# Altium PCB GPS-Module-New.PcbDoc (part 2 of 2)
Units mil, origin at the board's own origin, x right, y up, seen from the top; angles counter-clockwise.
Board outline 1574.8 x 1338.32 mil, 4 copper layers (Top Layer, Int1 (GND), Int2 (PWR), Bottom Layer), stack 60.118 mil thick; 48 components, 36 nets, 261 pads, 351 vias.
Unrouted connection lines stored in the file: 101.
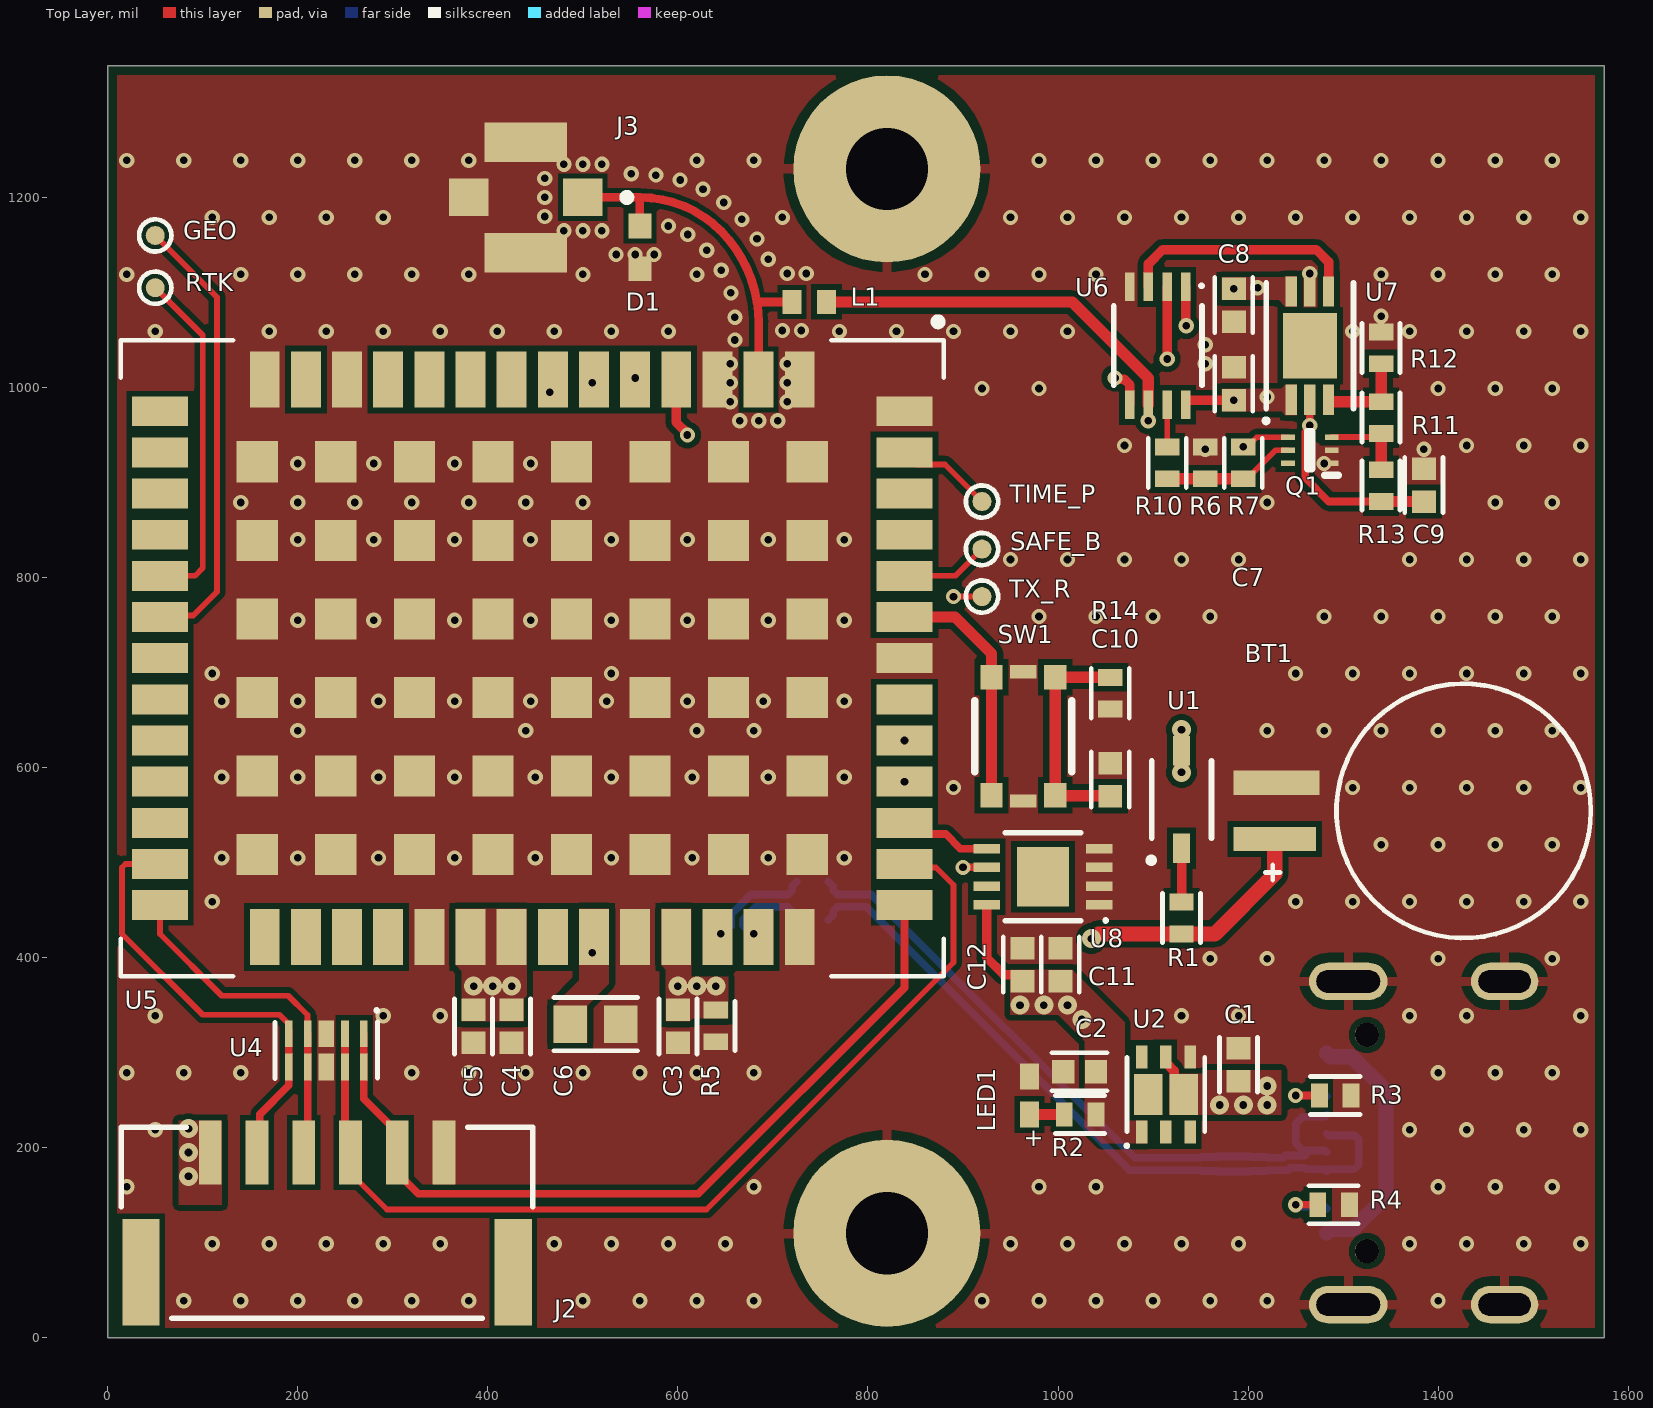
[diagram p0: Top Layer view]

## Part data (continued)
R1: library part ERJ-2RKF3001X, "Res Thick Film 0402 3K Ohm 1% 0.1W ±100ppm/°C Molded SMD Punched Carrier T/R", Case Code (Imperial)=0402, Case Code (Metric)=1005, Manufacturer=Panasonic, Max Operating Temperature=155°C, Max Power Dissipation=100mW, Min Operating Temperature=-55°C, Supplier Part Number=P3.00KLCT-ND, Temperature Coefficient=100ppm/°C, Tolerance=1%, Voltage Rating=50V, Case/Package=0402, Category="Chip SMD Resistors", China RoHS=Non-Compliant, ComponentLink1Description=https://sigma.octopart.com:443/138766958/technical_drawing/Panasonic-ERJ-2RKF3001X.pdf?src-supplier=Upverter, ComponentLink1URL=https://sigma.octopart.com:443/138766958/technical_drawing/Panasonic-ERJ-2RKF3001X.pdf?src-supplier=Upverter, ComponentLink2Description=https://datasheet.octopart.com:443/ERJ-2RKF3001X-Panasonic-datasheet-82288794.pdf?src-supplier=Panasonic+SCT, ComponentLink2URL=https://datasheet.octopart.com:443/ERJ-2RKF3001X-Panasonic-datasheet-82288794.pdf?src-supplier=Panasonic+SCT, ComponentLink3Description=https://datasheet.octopart.com:443/ERJ-2RKF3001X-Panasonic-datasheet-13266541.pdf?src-supplier=Future+Electronics, ComponentLink3URL=https://datasheet.octopart.com:443/ERJ-2RKF3001X-Panasonic-datasheet-13266541.pdf?src-supplier=Future+Electronics, ComponentLink4Description=https://datasheet.octopart.com:443/ERJ-2RKF3001X-Panasonic-datasheet-10025800.pdf?src-supplier=Future+Electronics, ComponentLink4URL=https://datasheet.octopart.com:443/ERJ-2RKF3001X-Panasonic-datasheet-10025800.pdf?src-supplier=Future+Electronics, ComponentLink5Description=https://datasheet.octopart.com:443/ERJ-2RKF3001X-Panasonic-datasheet-8853621.pdf?src-supplier=Future+Electronics, ComponentLink5URL=https://datasheet.octopart.com:443/ERJ-2RKF3001X-Panasonic-datasheet-8853621.pdf?src-supplier=Future+Electronics, ComponentLink6Description=https://datasheet.octopart.com:443/ERJ-2RKF3001X-Panasonic-datasheet-5313456.pdf?src-supplier=Future+Electronics, ComponentLink6URL=https://datasheet.octopart.com:443/ERJ-2RKF3001X-Panasonic-datasheet-5313456.pdf?src-supplier=Future+Electronics, ComponentLink7Description=https://datasheet.octopart.com:443/ERJ-2RKF3001X-Panasonic-datasheet-48891056.pdf?src-supplier=Newark, ComponentLink7URL=https://datasheet.octopart.com:443/ERJ-2RKF3001X-Panasonic-datasheet-48891056.pdf?src-supplier=Newark, ComponentLink8Description=https://datasheet.octopart.com:443/ERJ-2RKF3001X-Panasonic-datasheet-136608610.pdf?src-supplier=Newark, ComponentLink8URL=https://datasheet.octopart.com:443/ERJ-2RKF3001X-Panasonic-datasheet-136608610.pdf?src-supplier=Newark, ComponentLink9Description=https://datasheet.octopart.com:443/ERJ-2RKF3001X-Panasonic-datasheet-33006990.pdf?src-supplier=Newark, ComponentLink9URL=https://datasheet.octopart.com:443/ERJ-2RKF3001X-Panasonic-datasheet-33006990.pdf?src-supplier=Newark, ComponentLink10Description=https://datasheet.octopart.com:443/ERJ2RKF3001X-Panasonic-datasheet-21211697.pdf?src-supplier=element14+APAC, ComponentLink10URL=https://datasheet.octopart.com:443/ERJ2RKF3001X-Panasonic-datasheet-21211697.pdf?src-supplier=element14+APAC, ComponentLink11Description=https://datasheet.octopart.com:443/ERJ-2RKF3001X-Panasonic-datasheet-154766169.pdf?src-supplier=Master+Electronics, ComponentLink11URL=https://datasheet.octopart.com:443/ERJ-2RKF3001X-Panasonic-datasheet-154766169.pdf?src-supplier=Master+Electronics, ComponentLink12Description=https://datasheet.octopart.com:443/ERJ2RKF3001X-Panasonic-datasheet-188592431.pdf?src-supplier=TME, ComponentLink12URL=https://datasheet.octopart.com:443/ERJ2RKF3001X-Panasonic-datasheet-188592431.pdf?src-supplier=TME, ComponentLink13Description=https://datasheet.octopart.com:443/ERJ2RKF3001X-Panasonic-datasheet-164353789.pdf?src-supplier=TME, ComponentLink13URL=https://datasheet.octopart.com:443/ERJ2RKF3001X-Panasonic-datasheet-164353789.pdf?src-supplier=TME, ComponentLink14Description=https://datasheet.octopart.com/ERJ-2RKF3001X-Panasonic-datasheet-78375410.pdf, ComponentLink14URL=https://datasheet.octopart.com/ERJ-2RKF3001X-Panasonic-datasheet-78375410.pdf, ComponentLink15Description=https://datasheet.octopart.com:443/ERJ-2RKF3001X-Panasonic---ECG-datasheet-15994758.pdf?src-supplier=Farnell, ComponentLink15URL=https://datasheet.octopart.com:443/ERJ-2RKF3001X-Panasonic---ECG-datasheet-15994758.pdf?src-supplier=Farnell, ComponentLink16Description=https://datasheet.octopart.com:443/ERJ-2RKF3001X-Panasonic-datasheet-11542829.pdf?src-supplier=Arrow+Electronics, ComponentLink16URL=https://datasheet.octopart.com:443/ERJ-2RKF3001X-Panasonic-datasheet-11542829.pdf?src-supplier=Arrow+Electronics, ComponentLink17Description=https://datasheet.octopart.com:443/ERJ-2RKF3001X-Panasonic-datasheet-41391857.pdf?src-supplier=Electro+Sonic, ComponentLink17URL=https://datasheet.octopart.com:443/ERJ-2RKF3001X-Panasonic-datasheet-41391857.pdf?src-supplier=Electro+Sonic, Composition="Thick Film", Contact Plating=Tin, Depth=500µm, Features="Automotive AEC-Q200", Height=350µm, Lead Free="Lead Free", Length=1mm, Lifecycle Status=Production, Military Standard=Not, Mounting Technology="Surface Mount", MPN=ERJ-2RKF3001X, Number of Terminals=2, Number of Terminations=2, Packaging="Cut Tape", Power Dissipation=100mW, Power Rating=100mW, Pricing="1=0.1, 10=0.028, 25=0.0208, 50=0.0168, 100=0.0138, 250=0.01072, 500=0.009, 1000=0.00766, 5000=0.00554 (USD)", Radiation Hardening=No, REACH SVHC=Yes, RoHS=Compliant, Schedule B="8533210045, 8533210045|8533210045, 8533210045|8533210045|8533210045, 8533210045|8533210045|8533210045|8533210045", Stock=193068, Supplier=DigiKey, Termination=SMD/SMT, Voltage Rating (DC)=50V, Width=500µm, Working Voltage=50V
R2 R14: library part CRCW0402100RFKEDHP, "Res Thick Film 0402 100 Ohm 1% 0.2W ±100ppm/°C Molded SMD SMD Paper T/R", Case Code (Imperial)=0402, Case Code (Metric)=1005, Manufacturer=Vishay, Manufacturer Package Identifier=CRCW0402-HPe3, Max Operating Temperature=155°C, Min Operating Temperature=-55°C, Power Dissipation=200mW, Supplier Part Number=541-100YCT-ND, Temperature Coefficient=100ppm/°C, Tolerance=1%, Voltage Rating=50V, Case/Package=0402, Category="Chip SMD Resistors", China RoHS=Non-Compliant, ComponentLink1Description=https://datasheet.octopart.com/CRCW0402100RFKEDHP-Vishay-datasheet-83567917.pdf, ComponentLink1URL=https://datasheet.octopart.com/CRCW0402100RFKEDHP-Vishay-datasheet-83567917.pdf, ComponentLink2Description=https://datasheet.octopart.com/D-CRCW-e3-Standard-Thick-Film-Chip-Resistors-Vishay-datasheet-family-64.pdf, ComponentLink2URL=https://datasheet.octopart.com/D-CRCW-e3-Standard-Thick-Film-Chip-Resistors-Vishay-datasheet-family-64.pdf, ComponentLink3Description=https://datasheet.octopart.com:443/CRCW0402100RFKEDHP-Vishay-datasheet-87136057.pdf?src-supplier=element14+APAC, ComponentLink3URL=https://datasheet.octopart.com:443/CRCW0402100RFKEDHP-Vishay-datasheet-87136057.pdf?src-supplier=element14+APAC, ComponentLink4Description=https://datasheet.octopart.com:443/CRCW0402100RFKEDHP-Vishay-datasheet-78776210.pdf?src-supplier=element14+APAC, ComponentLink4URL=https://datasheet.octopart.com:443/CRCW0402100RFKEDHP-Vishay-datasheet-78776210.pdf?src-supplier=element14+APAC, ComponentLink5Description=https://datasheet.octopart.com:443/CRCW0402100RFKEDHP-Vishay-datasheet-62317933.pdf?src-supplier=element14+APAC, ComponentLink5URL=https://datasheet.octopart.com:443/CRCW0402100RFKEDHP-Vishay-datasheet-62317933.pdf?src-supplier=element14+APAC, ComponentLink6Description=https://datasheet.octopart.com:443/CRCW0402100RFKEDHP-Vishay-datasheet-37143532.pdf?src-supplier=element14+APAC, ComponentLink6URL=https://datasheet.octopart.com:443/CRCW0402100RFKEDHP-Vishay-datasheet-37143532.pdf?src-supplier=element14+APAC, ComponentLink7Description=https://datasheet.octopart.com:443/CRCW0402100RFKEDHP-Vishay-datasheet-66581887.pdf?src-supplier=element14+APAC, ComponentLink7URL=https://datasheet.octopart.com:443/CRCW0402100RFKEDHP-Vishay-datasheet-66581887.pdf?src-supplier=element14+APAC, ComponentLink8Description=https://datasheet.octopart.com:443/CRCW0402100RFKEDHP-Vishay-datasheet-13148866.pdf?src-supplier=_legacy+Avnet, ComponentLink8URL=https://datasheet.octopart.com:443/CRCW0402100RFKEDHP-Vishay-datasheet-13148866.pdf?src-supplier=_legacy+Avnet, ComponentLink9Description=https://datasheet.octopart.com:443/CRCW0402100RFKEDHP-Vishay-datasheet-13131392.pdf?src-supplier=_legacy+Avnet, ComponentLink9URL=https://datasheet.octopart.com:443/CRCW0402100RFKEDHP-Vishay-datasheet-13131392.pdf?src-supplier=_legacy+Avnet, ComponentLink10Description=https://datasheet.octopart.com:443/CRCW0402100RFKEDHP-Vishay-datasheet-12593106.pdf?src-supplier=_legacy+Avnet, ComponentLink10URL=https://datasheet.octopart.com:443/CRCW0402100RFKEDHP-Vishay-datasheet-12593106.pdf?src-supplier=_legacy+Avnet, ComponentLink11Description=https://datasheet.octopart.com:443/CRCW0402100RFKEDHP-Vishay-datasheet-12544674.pdf?src-supplier=_legacy+Avnet, ComponentLink11URL=https://datasheet.octopart.com:443/CRCW0402100RFKEDHP-Vishay-datasheet-12544674.pdf?src-supplier=_legacy+Avnet, ComponentLink12Description=https://datasheet.octopart.com:443/CRCW0402100RFKEDHP-Vishay-datasheet-12531795.pdf?src-supplier=_legacy+Avnet, ComponentLink12URL=https://datasheet.octopart.com:443/CRCW0402100RFKEDHP-Vishay-datasheet-12531795.pdf?src-supplier=_legacy+Avnet, ComponentLink13Description=https://datasheet.octopart.com:443/CRCW0402100RFKEDHP-Vishay-datasheet-12518686.pdf?src-supplier=_legacy+Avnet, ComponentLink13URL=https://datasheet.octopart.com:443/CRCW0402100RFKEDHP-Vishay-datasheet-12518686.pdf?src-supplier=_legacy+Avnet, ComponentLink14Description=https://datasheet.octopart.com:443/CRCW0402100RFKEDHP-Vishay-datasheet-12509906.pdf?src-supplier=_legacy+Avnet, ComponentLink14URL=https://datasheet.octopart.com:443/CRCW0402100RFKEDHP-Vishay-datasheet-12509906.pdf?src-supplier=_legacy+Avnet, ComponentLink15Description=https://datasheet.octopart.com:443/CRCW0402100RFKEDHP-Vishay-datasheet-10669844.pdf?src-supplier=_legacy+Avnet, ComponentLink15URL=https://datasheet.octopart.com:443/CRCW0402100RFKEDHP-Vishay-datasheet-10669844.pdf?src-supplier=_legacy+Avnet, ComponentLink16Description=https://datasheet.octopart.com:443/CRCW0402100RFKEDHP-Vishay-datasheet-8703221.pdf?src-supplier=_legacy+Avnet, ComponentLink16URL=https://datasheet.octopart.com:443/CRCW0402100RFKEDHP-Vishay-datasheet-8703221.pdf?src-supplier=_legacy+Avnet, ComponentLink17Description=https://datasheet.octopart.com:443/CRCW0402100RFKEDHP-Vishay-datasheet-62316122.pdf?src-supplier=Future+Electronics, ComponentLink17URL=https://datasheet.octopart.com:443/CRCW0402100RFKEDHP-Vishay-datasheet-62316122.pdf?src-supplier=Future+Electronics, ComponentLink18Description=https://datasheet.octopart.com:443/CRCW0402100RFKEDHP-Vishay-Dale-datasheet-47688881.pdf?src-supplier=RS+(Formerly+Allied+Electronics), ComponentLink18URL=https://datasheet.octopart.com:443/CRCW0402100RFKEDHP-Vishay-Dale-datasheet-47688881.pdf?src-supplier=RS+(Formerly+Allied+Electronics), ComponentLink19Description=https://datasheet.octopart.com:443/CRCW0402100RFKEDHP-Vishay-datasheet-8359436.pdf?src-supplier=Newark, ComponentLink19URL=https://datasheet.octopart.com:443/CRCW0402100RFKEDHP-Vishay-datasheet-8359436.pdf?src-supplier=Newark, ComponentLink20Description=http://sigma.octopart.com:80/rohs_certificate/D-CRCW-e3-Standard-Thick-Film-Chip-Resistors-Vishay-family-102.pdf?src-supplier=Compliance+Statements, ComponentLink20URL=http://sigma.octopart.com:80/rohs_certificate/D-CRCW-e3-Standard-Thick-Film-Chip-Resistors-Vishay-family-102.pdf?src-supplier=Compliance+Statements, Composition="Thick Film", Contact Plating=Tin, Depth=500µm, Height=300µm, Lead Free="Lead Free", Length=1mm, Lifecycle Status=Production, Mounting Technology="Surface Mount", MPN=CRCW0402100RFKEDHP, Number of Terminals=2, Packaging="Cut Tape", Power Rating=200mW, Pricing="1=0.11, 10=0.054, 25=0.0412, 50=0.034, 100=0.0286, 250=0.02312, 500=0.02002, 1000=0.01755, 5000=0.01363 (USD)", Radiation Hardening=No, REACH SVHC=Yes, RoHS=Compliant, Schedule B="8533210045, 8533210045|8533210045|8533210045|8533210045|8533210045|8533210045|8533210045, 8533210045|8533210045|8533210045|8533210045|8533210045|8533210045|8533210045|8533210045, 8533210045|8533210045|8533210045|8533210045|8533210045|8533210045|8533210045|8533210045|8533210045", Stock=523985, Supplier=DigiKey, Termination=SMD/SMT, Voltage Rating (DC)=50V, Weight=652.039032µg, Width=500µm, Working Voltage=50V
R3 R4: library part RC0402FR-135K1L, "Res Thick Film 0402 5.1K Ohm 1% 0.063W(1/16W) ±100ppm/C Pad SMD T/R", Case Code (Imperial)=0402, Case Code (Metric)=1005, Manufacturer="Yageo Group", Max Operating Temperature=155°C, Min Operating Temperature=-55°C, Power Dissipation=62.5mW, Supplier Part Number=13-RC0402FR-135K1LCT-ND, Temperature Coefficient=100ppm/°C, Tolerance=1%, Voltage Rating=50V, Case/Package=0402, Category="Chip SMD Resistors", China RoHS=Non-Compliant, ComponentLink1Description=https://datasheet.octopart.com:443/RC0402FR-135K1L-Yageo-datasheet-175887523.pdf?src-supplier=IHS, ComponentLink1URL=https://datasheet.octopart.com:443/RC0402FR-135K1L-Yageo-datasheet-175887523.pdf?src-supplier=IHS, ComponentLink2Description=https://datasheet.octopart.com:443/RC0402FR-135K1L-Yageo-datasheet-164759695.pdf?src-supplier=Future+Electronics, ComponentLink2URL=https://datasheet.octopart.com:443/RC0402FR-135K1L-Yageo-datasheet-164759695.pdf?src-supplier=Future+Electronics, ComponentLink3Description=https://datasheet.octopart.com/RC0402FR-135K1L-Yageo-datasheet-73766026.pdf, ComponentLink3URL=https://datasheet.octopart.com/RC0402FR-135K1L-Yageo-datasheet-73766026.pdf, ComponentLink4Description=https://datasheet.octopart.com:443/RC0402FR-135K1L-Yageo-datasheet-10408619.pdf?src-supplier=_legacy+Avnet, ComponentLink4URL=https://datasheet.octopart.com:443/RC0402FR-135K1L-Yageo-datasheet-10408619.pdf?src-supplier=_legacy+Avnet, ComponentLink5Description=http://sigma.octopart.com:80/conflict_mineral_statement/Yageo-company-3.pdf?src-supplier=Compliance+Statements, ComponentLink5URL=http://sigma.octopart.com:80/conflict_mineral_statement/Yageo-company-3.pdf?src-supplier=Compliance+Statements, ComponentLink6Description=http://sigma.octopart.com:80/rohs_statement/Yageo-company-2.pdf?src-supplier=Compliance+Statements, ComponentLink6URL=http://sigma.octopart.com:80/rohs_statement/Yageo-company-2.pdf?src-supplier=Compliance+Statements, Composition="Thick Film", Contact Plating=Tin, Height=350µm, Length=1mm, Lifecycle Status=Production, Mounting Technology="Surface Mount", MPN=RC0402FR-135K1L, Number of Terminals=2, Packaging="Tape & Reel", Power Rating=62.5mW, Pricing="1=0.1, 10=0.005, 25=0.0044, 50=0.004, 100=0.0036, 250=0.00328 (USD)", Radiation Hardening=No, REACH SVHC=Yes, RoHS=Compliant, Stock=214134, Supplier=DigiKey, Termination=SMD/SMT, Width=500µm, Working Voltage=50V
R5 R7 R12: library part CRCW0402100KFKEDC, "Res Thick Film 0402 100K Ohm 1% 0.063W(1/16W) ±100ppm/C Pad SMD T/R", Case/Package=0402, Manufacturer=Vishay, Max Operating Temperature=155°C, Min Operating Temperature=-55°C, Power Dissipation=63mW, Supplier Part Number=541-3960-1-ND, Temperature Coefficient=100ppm/°C, Tolerance=1%, Voltage Rating=50V, Category="Chip SMD Resistors", China RoHS=Non-Compliant, ComponentLink1Description=https://datasheet.octopart.com:443/CRCW0402100KFKEDC-Vishay-datasheet-102570912.pdf?src-supplier=Upverter, ComponentLink1URL=https://datasheet.octopart.com:443/CRCW0402100KFKEDC-Vishay-datasheet-102570912.pdf?src-supplier=Upverter, ComponentLink2Description=https://datasheet.octopart.com:443/CRCW0402100KFKEDC-Vishay-datasheet-175423585.pdf?src-supplier=IHS, ComponentLink2URL=https://datasheet.octopart.com:443/CRCW0402100KFKEDC-Vishay-datasheet-175423585.pdf?src-supplier=IHS, ComponentLink3Description=https://datasheet.octopart.com:443/CRCW0402100KFKEDC-Vishay-datasheet-100063072.pdf?src-supplier=Future+Electronics, ComponentLink3URL=https://datasheet.octopart.com:443/CRCW0402100KFKEDC-Vishay-datasheet-100063072.pdf?src-supplier=Future+Electronics, ComponentLink4Description=https://datasheet.octopart.com:443/CRCW0402100KFKEDC-Vishay-datasheet-62316122.pdf?src-supplier=Future+Electronics, ComponentLink4URL=https://datasheet.octopart.com:443/CRCW0402100KFKEDC-Vishay-datasheet-62316122.pdf?src-supplier=Future+Electronics, ComponentLink5Description=http://sigma.octopart.com:80/rohs_statement/Vishay-company-15.pdf?src-supplier=Compliance+Statements, ComponentLink5URL=http://sigma.octopart.com:80/rohs_statement/Vishay-company-15.pdf?src-supplier=Compliance+Statements, Composition="Thick Film", Contact Plating=Tin, Height=300µm, Lead Free="Lead Free", Length=1mm, Lifecycle Status=Production, Mounting Technology="Surface Mount", MPN=CRCW0402100KFKEDC, Number of Terminals=2, Power Rating=63mW, Pricing="1=0.1, 10=0.028, 25=0.0208, 50=0.0168, 100=0.0138, 250=0.01072, 500=0.009, 1000=0.00766, 5000=0.00554 (USD)", REACH SVHC=Yes, RoHS=Compliant, Schedule B="8533210045, 8533210045|8533210045, 8533210045|8533210045|8533210045, 8533210045|8533210045|8533210045|8533210045", Stock=265190, Supplier=DigiKey, Termination=Wraparound, Width=500µm, Working Voltage=50V
R6 R10: library part RC0402JR-070RL, "GENERAL PURPOSE CHIP RESISTOR Metal Glaze/thick Film, 0.0625W, 0ohm, Surface Mount, 0402", Case Code (Imperial)=0402, Manufacturer="Yageo Group", Max Operating Temperature=155°C, Max Power Dissipation=63mW, Min Operating Temperature=-55°C, Power Dissipation=62.5mW, Supplier Part Number=311-0.0JRCT-ND, Temperature Coefficient=200ppm/°C, Tolerance=5%, Voltage Rating=50V, Case/Package=0402, Category="Chip SMD Resistors", China RoHS=Non-Compliant, ComponentLink1Description=https://datasheet.octopart.com:443/RC0402JR-070RL-Yageo-datasheet-182189538.pdf?src-supplier=IHS, ComponentLink1URL=https://datasheet.octopart.com:443/RC0402JR-070RL-Yageo-datasheet-182189538.pdf?src-supplier=IHS, ComponentLink2Description=https://datasheet.octopart.com:443/RC0402JR-070RL-Yageo-datasheet-10408619.pdf?src-supplier=Newark, ComponentLink2URL=https://datasheet.octopart.com:443/RC0402JR-070RL-Yageo-datasheet-10408619.pdf?src-supplier=Newark, ComponentLink3Description=https://datasheet.octopart.com:443/RC0402JR-070RL-Yageo-datasheet-12531192.pdf?src-supplier=Seeed+Studio, ComponentLink3URL=https://datasheet.octopart.com:443/RC0402JR-070RL-Yageo-datasheet-12531192.pdf?src-supplier=Seeed+Studio, ComponentLink4Description=https://datasheet.octopart.com:443/RC0402JR-070RL-Yageo-datasheet-8324527.pdf?src-supplier=TME, ComponentLink4URL=https://datasheet.octopart.com:443/RC0402JR-070RL-Yageo-datasheet-8324527.pdf?src-supplier=TME, ComponentLink5Description=https://datasheet.octopart.com:443/RC0402JR-070RL-Yageo-datasheet-62067350.pdf?src-supplier=Farnell, ComponentLink5URL=https://datasheet.octopart.com:443/RC0402JR-070RL-Yageo-datasheet-62067350.pdf?src-supplier=Farnell, ComponentLink6Description=https://datasheet.octopart.com:443/RC0402JR-070RL-Yageo-datasheet-8329306.pdf?src-supplier=element14, ComponentLink6URL=https://datasheet.octopart.com:443/RC0402JR-070RL-Yageo-datasheet-8329306.pdf?src-supplier=element14, ComponentLink7Description=https://datasheet.octopart.com:443/RC0402JR-070RL-Yageo-datasheet-505231.pdf?src-supplier=element14, ComponentLink7URL=https://datasheet.octopart.com:443/RC0402JR-070RL-Yageo-datasheet-505231.pdf?src-supplier=element14, ComponentLink8Description=https://datasheet.octopart.com:443/RC0402JR-070RL-Yageo-datasheet-175423674.pdf?src-supplier=SOS+electronic, ComponentLink8URL=https://datasheet.octopart.com:443/RC0402JR-070RL-Yageo-datasheet-175423674.pdf?src-supplier=SOS+electronic, ComponentLink9Description=https://datasheet.octopart.com:443/RC0402JR-070RL-Yageo-datasheet-164759695.pdf?src-supplier=Future+Electronics, ComponentLink9URL=https://datasheet.octopart.com:443/RC0402JR-070RL-Yageo-datasheet-164759695.pdf?src-supplier=Future+Electronics, ComponentLink10Description=https://datasheet.octopart.com:443/RC0402JR-070RL-Yageo-datasheet-137700087.pdf?src-supplier=Future+Electronics, ComponentLink10URL=https://datasheet.octopart.com:443/RC0402JR-070RL-Yageo-datasheet-137700087.pdf?src-supplier=Future+Electronics, ComponentLink11Description=https://datasheet.octopart.com/RC0402JR-070RL-Yageo-datasheet-73766026.pdf, ComponentLink11URL=https://datasheet.octopart.com/RC0402JR-070RL-Yageo-datasheet-73766026.pdf, ComponentLink12Description=http://sigma.octopart.com:80/conflict_mineral_statement/Yageo-company-3.pdf?src-supplier=Compliance+Statements, ComponentLink12URL=http://sigma.octopart.com:80/conflict_mineral_statement/Yageo-company-3.pdf?src-supplier=Compliance+Statements, ComponentLink13Description=http://sigma.octopart.com:80/rohs_statement/Yageo-company-2.pdf?src-supplier=Compliance+Statements, ComponentLink13URL=http://sigma.octopart.com:80/rohs_statement/Yageo-company-2.pdf?src-supplier=Compliance+Statements, Composition="Thick Film", Contact Plating=Tin, Depth=500µm, Features="Moisture Resistant", Height=350µm, Lead Free="Lead Free", Length=1mm, Lifecycle Status=Production, Military Standard=Not, Mounting Technology="Surface Mount", MPN=RC0402JR-070RL, Number of Terminals=2, Number of Terminations=2, Packaging="Tape & Reel", Pins=2, Power Rating=63mW, Pricing="1=0.1, 10=0.010, 25=0.0064, 50=0.0054, 100=0.0047, 250=0.00392, 500=0.00346, 1000=0.00304, 5000=0.0023 (USD)", Radiation Hardening=No, REACH SVHC=Yes, RoHS=Compliant, Schedule B="8533290000, 8533290000|8533290000, 8533290000|8533290000|8533290000, 8533290000|8533290000|8533290000|8533290000", Stock=22123349, Supplier=DigiKey, Termination=SMD/SMT, Voltage Rating (DC)=50V, Width=500µm
R8 R9: library part RC0402JR-0727RL, "Res General Purpose Thick Film 0402 27 Ohm 5% 1/16W ±100ppm/°C Molded SMD Paper T/R", Case Code (Imperial)=0402, Manufacturer="Yageo Group", Max Operating Temperature=155°C, Min Operating Temperature=-55°C, Power Dissipation=62.5mW, Supplier Part Number=311-27JRCT-ND, Temperature Coefficient=100ppm/°C, Tolerance=5%, Voltage Rating=50V, Case/Package=0402, Category="Chip SMD Resistors", China RoHS=Non-Compliant, ComponentLink1Description=https://datasheet.octopart.com:443/RC0402JR-0727RL-Yageo-datasheet-175887523.pdf?src-supplier=IHS, ComponentLink1URL=https://datasheet.octopart.com:443/RC0402JR-0727RL-Yageo-datasheet-175887523.pdf?src-supplier=IHS, ComponentLink2Description=https://datasheet.octopart.com:443/RC0402JR-0727RL-Yageo-datasheet-10408619.pdf?src-supplier=Newark, ComponentLink2URL=https://datasheet.octopart.com:443/RC0402JR-0727RL-Yageo-datasheet-10408619.pdf?src-supplier=Newark, ComponentLink3Description=https://datasheet.octopart.com:443/RC0402JR-0727RL-Yageo-datasheet-8324527.pdf?src-supplier=Newark, ComponentLink3URL=https://datasheet.octopart.com:443/RC0402JR-0727RL-Yageo-datasheet-8324527.pdf?src-supplier=Newark, ComponentLink4Description=https://datasheet.octopart.com:443/RC0402JR-0727RL-Yageo-datasheet-62067350.pdf?src-supplier=element14+APAC, ComponentLink4URL=https://datasheet.octopart.com:443/RC0402JR-0727RL-Yageo-datasheet-62067350.pdf?src-supplier=element14+APAC, ComponentLink5Description=https://datasheet.octopart.com:443/RC0402JR-0727RL-Yageo-datasheet-164759695.pdf?src-supplier=Future+Electronics, ComponentLink5URL=https://datasheet.octopart.com:443/RC0402JR-0727RL-Yageo-datasheet-164759695.pdf?src-supplier=Future+Electronics, ComponentLink6Description=https://datasheet.octopart.com:443/RC0402JR-0727RL-Yageo-datasheet-127823281.pdf?src-supplier=Future+Electronics, ComponentLink6URL=https://datasheet.octopart.com:443/RC0402JR-0727RL-Yageo-datasheet-127823281.pdf?src-supplier=Future+Electronics, ComponentLink7Description=https://datasheet.octopart.com:443/RC0402JR-0727RL-Yageo-datasheet-137700087.pdf?src-supplier=Future+Electronics, ComponentLink7URL=https://datasheet.octopart.com:443/RC0402JR-0727RL-Yageo-datasheet-137700087.pdf?src-supplier=Future+Electronics, ComponentLink8Description=https://datasheet.octopart.com:443/RC0402JR-0727RL-Yageo-datasheet-103092701.pdf?src-supplier=Future+Electronics, ComponentLink8URL=https://datasheet.octopart.com:443/RC0402JR-0727RL-Yageo-datasheet-103092701.pdf?src-supplier=Future+Electronics, ComponentLink9Description=https://datasheet.octopart.com:443/RC0402JR-0727RL-Yageo-datasheet-12531192.pdf?src-supplier=Future+Electronics, ComponentLink9URL=https://datasheet.octopart.com:443/RC0402JR-0727RL-Yageo-datasheet-12531192.pdf?src-supplier=Future+Electronics, ComponentLink10Description=https://datasheet.octopart.com:443/RC0402JR-0727RL-Yageo-datasheet-505231.pdf?src-supplier=Future+Electronics, ComponentLink10URL=https://datasheet.octopart.com:443/RC0402JR-0727RL-Yageo-datasheet-505231.pdf?src-supplier=Future+Electronics, ComponentLink11Description=https://datasheet.octopart.com/RC0402JR-0727RL-Yageo-datasheet-73766026.pdf, ComponentLink11URL=https://datasheet.octopart.com/RC0402JR-0727RL-Yageo-datasheet-73766026.pdf, ComponentLink12Description=https://datasheet.octopart.com:443/RC0402JR-0727RL-Yageo-datasheet-8329306.pdf?src-supplier=element14, ComponentLink12URL=https://datasheet.octopart.com:443/RC0402JR-0727RL-Yageo-datasheet-8329306.pdf?src-supplier=element14, ComponentLink13Description=http://sigma.octopart.com:80/rohs_statement/Yageo-company-2.pdf?src-supplier=Compliance+Statements, ComponentLink13URL=http://sigma.octopart.com:80/rohs_statement/Yageo-company-2.pdf?src-supplier=Compliance+Statements, ComponentLink14Description=http://sigma.octopart.com:80/conflict_mineral_statement/Yageo-company-3.pdf?src-supplier=Compliance+Statements, ComponentLink14URL=http://sigma.octopart.com:80/conflict_mineral_statement/Yageo-company-3.pdf?src-supplier=Compliance+Statements, Composition="Thick Film", Depth=500µm, Height=350µm, Lead Free="Lead Free", Length=1mm, Lifecycle Status=Production, Military Standard=Not, Mounting Technology="Surface Mount", MPN=RC0402JR-0727RL, Number of Terminals=2, Pins=2, Power Rating=62.5mW, Pricing="1=0.1, 10=0.006, 25=0.0044, 50=0.003, 100=0.0028 (USD)", REACH SVHC=Yes, RoHS=Compliant, Schedule B="8533210045, 8533210045|8533210045|8533210045|8533210045|8533210045", Stock=810923, Supplier=DigiKey, Termination=SMD/SMT, Voltage Rating (AC)=50V, Voltage Rating (DC)=50V, Weight=652.039032µg, Width=500µm, Working Voltage=50V
R11: library part CRCW04021K00FKEDC, "Res Thick Film 0402 1K Ohm 1% 0.063W(1/16W) ±100ppm/C Pad SMD T/R", Case/Package=0402, Manufacturer=Vishay, Max Operating Temperature=155°C, Min Operating Temperature=-55°C, Power Dissipation=63mW, Supplier Part Number=541-3961-1-ND, Temperature Coefficient=100ppm/°C, Tolerance=1%, Voltage Rating=50V, Category="Chip SMD Resistors", China RoHS=Non-Compliant, ComponentLink1Description=https://datasheet.octopart.com:443/CRCW04021K00FKEDC-Vishay-datasheet-102570912.pdf?src-supplier=Upverter, ComponentLink1URL=https://datasheet.octopart.com:443/CRCW04021K00FKEDC-Vishay-datasheet-102570912.pdf?src-supplier=Upverter, ComponentLink2Description=https://datasheet.octopart.com:443/CRCW04021K00FKEDC-Vishay-datasheet-175423585.pdf?src-supplier=IHS, ComponentLink2URL=https://datasheet.octopart.com:443/CRCW04021K00FKEDC-Vishay-datasheet-175423585.pdf?src-supplier=IHS, ComponentLink3Description=https://datasheet.octopart.com:443/CRCW04021K00FKEDC-Vishay-datasheet-100063072.pdf?src-supplier=Future+Electronics, ComponentLink3URL=https://datasheet.octopart.com:443/CRCW04021K00FKEDC-Vishay-datasheet-100063072.pdf?src-supplier=Future+Electronics, ComponentLink4Description=https://datasheet.octopart.com:443/CRCW04021K00FKEDC-Vishay-datasheet-62316122.pdf?src-supplier=Future+Electronics, ComponentLink4URL=https://datasheet.octopart.com:443/CRCW04021K00FKEDC-Vishay-datasheet-62316122.pdf?src-supplier=Future+Electronics, ComponentLink5Description=http://sigma.octopart.com:80/rohs_statement/Vishay-company-15.pdf?src-supplier=Compliance+Statements, ComponentLink5URL=http://sigma.octopart.com:80/rohs_statement/Vishay-company-15.pdf?src-supplier=Compliance+Statements, Composition="Thick Film", Contact Plating=Tin, Height=300µm, Lead Free="Lead Free", Length=1mm, Lifecycle Status=Production, Mounting Technology="Surface Mount", MPN=CRCW04021K00FKEDC, Number of Terminals=2, Power Rating=63mW, Pricing="1=0.1, 10=0.028, 25=0.0208, 50=0.0168, 100=0.0138, 250=0.01072, 500=0.009, 1000=0.00766, 5000=0.00546 (USD)", REACH SVHC=Yes, RoHS=Compliant, Schedule B="8533210045, 8533210045|8533210045|8533210045|8533210045|8533210045", Stock=1938339, Supplier=DigiKey, Termination=Wraparound, Width=500µm, Working Voltage=50V
R13: library part CR0402-FX-18R0GLF, "Res Thick Film 0402 18 Ohm 1% 0.063W(1/16W) ±100ppm/C Pad SMD T/R", Case Code (Imperial)=0402, Case Code (Metric)=1005, Manufacturer=Bourns, Max Operating Temperature=155°C, Min Operating Temperature=-55°C, Power Dissipation=62.5mW, Supplier Part Number=CR0402-FX-18R0GLFCT-ND, Temperature Coefficient=100ppm/°C, Tolerance=1%, Voltage Rating=50V, Case/Package=0402, Category="Chip SMD Resistors", China RoHS=Non-Compliant, ComponentLink1Description=https://datasheet.octopart.com:443/CR0402-FX-18R0GLF-Bourns-datasheet-159578630.pdf?src-supplier=IHS, ComponentLink1URL=https://datasheet.octopart.com:443/CR0402-FX-18R0GLF-Bourns-datasheet-159578630.pdf?src-supplier=IHS, ComponentLink2Description=https://datasheet.octopart.com:443/CR0402-FX-18R0GLF-Bourns-datasheet-181955239.pdf?src-supplier=IHS, ComponentLink2URL=https://datasheet.octopart.com:443/CR0402-FX-18R0GLF-Bourns-datasheet-181955239.pdf?src-supplier=IHS, ComponentLink3Description=https://datasheet.octopart.com:443/CR0402-FX-18R0GLF-Bourns-datasheet-154729664.pdf?src-supplier=Electro+Sonic, ComponentLink3URL=https://datasheet.octopart.com:443/CR0402-FX-18R0GLF-Bourns-datasheet-154729664.pdf?src-supplier=Electro+Sonic, ComponentLink4Description=https://datasheet.octopart.com/CR0402-FX-18R0GLF-Bourns-datasheet-8723995.pdf, ComponentLink4URL=https://datasheet.octopart.com/CR0402-FX-18R0GLF-Bourns-datasheet-8723995.pdf, ComponentLink5Description=https://datasheet.octopart.com:443/CR0402-FX-18R0GLF-Bourns-datasheet-140567134.pdf?src-supplier=Arrow.cn, ComponentLink5URL=https://datasheet.octopart.com:443/CR0402-FX-18R0GLF-Bourns-datasheet-140567134.pdf?src-supplier=Arrow.cn, ComponentLink6Description=http://sigma.octopart.com:80/conflict_mineral_statement/Bourns-company-36.pdf?src-supplier=Compliance+Statements, ComponentLink6URL=http://sigma.octopart.com:80/conflict_mineral_statement/Bourns-company-36.pdf?src-supplier=Compliance+Statements, Composition="Thick Film", Contact Plating=Tin, Depth=500µm, Height=320µm, Lifecycle Status=Production, Military Standard=Not, Mounting Technology="Surface Mount", MPN=CR0402-FX-18R0GLF, Number of Terminals=2, Power Rating=62.5mW, Pricing="1=0.1, 10=0.016, 25=0.0112, 50=0.0086, 100=0.0069, 250=0.00516, 500=0.00422, 1000=0.00349, 5000=0.00259 (USD)", Radiation Hardening=No, REACH SVHC=Yes, RoHS=Compliant, Schedule B="8533210045, 8533210045|8533210045|8533210045|8533210045|8533210045", Stock=441130, Supplier=DigiKey, Termination=SMD/SMT, Width=500µm, Working Voltage=50V
SW1: "WS-TASV SMT Tact Switch with ground terminal, L3 x W2.6 x H1.4mm, 450g, SPST-NO, 12V, 50mA", Manufacturer="Wurth Elektronik", Operating Temperature Max=85°C, Operating Temperature Min=-40°C, Rated Current=50mA, Rated Voltage (DC)=12V, Category="Tact Switches", Circuit=SPST-NO, ComponentLink1Description="Website Link", ComponentLink1URL=https://www.we-online.com/redexpert/article/435151014845?ad, ComponentLink2Description="Datasheet Link", ComponentLink2URL=https://www.we-online.com/redexpert/spec/435151014845?ad, Contact Material="Stainless Steel", Contact Plating=Silver, Height=1.4mm, Length=3mm, Match Code=WS-TASV, Mount="Surface Mount", MPN=435151014845, Operation Force=450g, Packaging="Tape and Reel", Terminal Material="Copper Alloy", Terminal Plating=Silver, Washable=No, Width=2.6mm
U1: "Diode 30 V 30mA Surface Mount SOD-323", Manufacturer_Name=onsemi, Copyright="Copyright (C) 2025 Ultra Librarian. All rights reserved.", MPN=RB751V40T1G, RefDes=RefDes, Type=Type
U2: "Linear Voltage Regulator IC Positive Fixed 1 Output 500mA 6-WDFN (2x2)", Manufacturer_Name=onsemi, Copyright="Copyright (C) 2025 Ultra Librarian. All rights reserved.", MPN=NCV8705MT33TCG, RefDes=RefDes, Type=Type
U3: "TVS DIODE 5.5VWM 6UDFN", Manufacturer_Name=onsemi, Copyright="Copyright (C) 2025 Ultra Librarian. All rights reserved.", MPN=ESDR0502NMUTBG, RefDes=RefDes, Type=Type
U4: "TVS DIODE 5VWM 10VC 10UDFN", Manufacturer_Name=onsemi, Copyright="Copyright (C) 2025 Ultra Librarian. All rights reserved.", MPN=ESD7104MUTAG, RefDes=RefDes, Type=Type
U5: "series RF Receiver BeiDou, Galileo, GLONASS, GNSS, GPS 1.207GHz, 1.2276GHz, 1.246GHz, 1.561GHz, 1.575GHz, 1.602GHz -167dBm 921.6kbps - 54-LGA (22x17)", Package="SMD-54 u-blox", Check_prices=https://www.snapeda.com/parts/ZED-F9P-04B/u-blox/view-part/?ref=eda, MF=U-Blox, MPN=ZED-F9P-04B, SnapEDA_Link=https://www.snapeda.com/parts/ZED-F9P-04B/u-blox/view-part/?ref=snap
U6: "Automotive 3-ch, 1.65-V to 5.5-V buffers with open-drain outputs 8-VSSOP -40 to 125", Manufacturer_Name="Texas Instruments", Copyright="Copyright (C) 2025 Ultra Librarian. All rights reserved.", Datasheet=https://www.ti.com/lit/gpn/sn74lvc3g07-q1, MPN=SN74LVC3G07QDCURQ1, RefDes=RefDes, Type=Type
U7: "Op Amp Single Low Power Amplifier R-R I/O 18V Automotive 6-Pin DFN EP T/R", Package="DFN -6 Analog Devices", Availability="In Stock", Check_prices=https://www.snapeda.com/parts/LT6000CDCB%23TRPBF/Analog+Devices/view-part/?ref=eda, MF="Analog Devices", MPN=LT6000CDCB#TRPBF, Price=None, SnapEDA_Link=https://www.snapeda.com/parts/LT6000CDCB%23TRPBF/Analog+Devices/view-part/?ref=snap
U8: "IC EEPROM 512KBIT I2C 8UDFN", Manufacturer_Name=Microchip, Copyright="Copyright (C) 2025 Ultra Librarian. All rights reserved.", MPN=AT24C512C-MAHM-T, RefDes=RefDes, Type=Type

## Free pads (board coordinates)
  round 196.85 hole 86.61: 1(820,110) 1(820,1230)

## Via types
v1: diameter 16, hole 8, Top Layer to Bottom Layer, tented both sides, 330 vias
v2: diameter 20, hole 8, Top Layer to Bottom Layer, tented both sides, 21 vias

## Nets (pads, with @x,y where several pads share a name; then routed paths per layer and width w, separated by ;. In a path a pad name is that pad's centre, name@x,y a point inside that pad or via, vN(x,y) a via of type N, cw(c..) or ccw(c..) an arc to the next point about the centre after c; other vN are vias at no path point)
3V3: C2.2 C3.2 C4.2 C5.2 C7.2 C8.2 C11.1 C12.1 R2.2 R5.2 U1.2 U2.1 U5.33 U5.34 U5.38 U6.8 U7.1 U7.6 U8.8 | length 205.3
  Top Layer w10: U8.8 925,400 942.83,382.17 955.59,382.17 C12.1 ; U6.8 1134.53,986.68 C7.2
  Top Layer w12: C7.2 C7.2@1185.16,986.84 ; U7.1@1245.32,986.84 U7.1 ; U7.6 U7.6@1245.32,1102.5
  Top Layer w16: v2(1130,595) U1.2 v2(1130,640)
  other v1: 1185.08,986.76 1220,990 1185,1104 1210,1105
  other v2: 1025,335 960,350 985,350 1010,350 385,370 405,370 425,370 600,370 620,370 640,370
ANT_DET: U5.4 U6.5 | length 598.2
  Top Layer w10: U5.4 598.31,963.32 610,951.62 v1(610,950) ; v1(1060,1010) 1061.15,1008.85 1069.61,1008.85 1075.47,1002.99 U6.5
  Int2 (PWR) w10: v1(610,950) 635,925 975,925 v1(1060,1010)
ANT_OFF: U5.5 U6.1 | length 697.2
  Top Layer w10: v1@1134.53,1065.47 U6.1
  Int2 (PWR) w10: v1(555,1010) 580,1010 645,945 955,945 1065,1055 1123.38,1055 1133.38,1065 v1(1135,1065)
ANT_SHORT_N: U5.6 U6.2 | length 774.3
  Top Layer w10: U6.2 1114.84,1030.16 v1(1115,1030)
  Int2 (PWR) w10: v1(510,1005) 610,905 990,905 v1(1115,1030)
ANT_SUPPLY: D1.1 J3.1 L1.1 U5.2 | length 388.6
  Top Layer w9: J3.1 560.43,1200 ; D1.1 560,1199.57 560.43,1200 ; 644.92,1165.08 ccw(c560.5,1080.5) 560.54,1200 560.43,1200 ; 644.95,1165.05 cw(c548.42,1068.54) 683.27,1089.73 ; U5.2 684.92,1068.49 684.92,1068.57 ccw(c548.42,1068.54) 683.27,1089.73 ; L1.1 683.54,1090 683.27,1089.73
CC1: J1.A5 R3.1 | length 58.1
  Top Layer w8: v1(1250,255) R3.1
  Bottom Layer w8: v1(1250,255) 1250.39,254.61 1282.4,254.61 J1.A5
CC2: J1.B5 R4.2 | length 57.7
  Top Layer w8: v1(1250,140) R4.2
  Bottom Layer w8: v1(1250,140) 1252.16,140 1254.16,138.01 1280.89,138.01 J1.B5
GEOFENCE_STAT: RTK.1 U5.19 | length 364.1
  Top Layer w6: RTK.1 100,1055 100,810 91.77,801.77 U5.19
GND: BT1.NEG C1.1 C2.1 C3.1 C4.1 C5.1 C6.2 C7.1 C8.1 C9.1 C10.1 C11.2 C12.2 D1.2 J1.A1_B12 J1.B1_A12 J1.SH1 J1.SH2 J1.SH3 J1.SH4 J2.6 J3.S1 J3.S2 J3.S3 LED1.1 pad.1 Q1.1 Q1.2 R3.2 R4.1 R5.1 R6.2 R12.1 R14.1 SW1.G1 SW1.G2 U2.4 U3.1 U4.3 U4.8 U5.1 U5.3 U5.12 U5.14 U5.32 U5.37 U5.41 U5.48 U5.54 U5.55 U5.56 U5.57 U5.58 U5.59 U5.60 U5.61 U5.62 U5.63 U5.64 U5.65 U5.66 U5.67 U5.68 U5.69 U5.70 U5.71 U5.72 U5.73 U5.74 U5.75 U5.76 U5.77 U5.78 U5.79 U5.80 U5.81 U5.82 U5.83 U5.84 U5.85 U5.86 U5.87 U5.88 U5.89 U5.90 U5.91 U5.92 U5.93 U5.94 U5.95 U5.96 U5.97 U5.98 U5.99 U5.100 U5.101 U5.102 U6.4 U7.5 U8.1 U8.2 U8.3 U8.4
  other v1: 80,39 140,39 200,39 260,39 320,39 380,39 500,39 560,39 620,39 680,39 920,39 980,39 1040,39 1100,39 1160,39 1220,39 1400,39 110,99 170,99 230,99 290,99 350,99 470,99 530,99 590,99 650,99 950,99 1010,99 1070,99 1130,99 1190,99 1370,99 1430,99 1490,99 1550,99 20,159 680,159 980,159 1040,159 1400,159 1460,159 1520,159 50,219 1370,219 1430,219 1490,219 1550,219 20,279 80,279 140,279 320,279 380,279 440,279 500,279 560,279 620,279 680,279 1400,279 1460,279 1520,279 50,339 290,339 350,339 1130,339 1190,339 1370,339 1430,339 1550,339 1160,399 1220,399 1400,399 1520,399 110,459 1250,459 1310,459 1370,459 1430,459 1490,459 1550,459 120,505 200,505 285,505 365,505 450,505 530,505 615,505 695,505 775,505 1340,519 1400,519 1460,519 1520,519 890,579 1310,579 1370,579 1430,579 1490,579 1550,579 120,590 200,590 285,590 365,590 450,590 530,590 615,590 695,590 775,590 200,639 440,639 620,639 680,639 1220,639 1280,639 1340,639 1400,639 1460,639 1520,639 120,670 200,670 285,670 365,670 445,670 525,670 610,670 690,670 775,670 110,699 530,699 1250,699 1310,699 1370,699 1430,699 1490,699 1550,699 200,755 280,755 365,755 445,755 530,755 610,755 695,755 775,755 980,759 1040,759 1100,759 1160,759 1280,759 1340,759 1400,759 1460,759 1520,759 950,819 1010,819 1070,819 1130,819 1190,819 1370,819 1430,819 1490,819 1550,819 200,840 280,840 365,840 445,840 530,840 610,840 695,840 775,840 140,879 200,879 260,879 320,879 380,879 440,879 500,879 1220,879 1460,879 1520,879 200,920 280,920 365,920 445,920 1280,920 1155,935 1385,935 1070,939 1430,939 1490,939 1550,939 665,965 685,965 705,965 655,985 715,985 920,999 980,999 1400,999 1460,999 1520,999 655,1005 715,1005 655,1025 715,1025 1155,1025 1155,1045 660,1050 50,1059 170,1059 230,1059 290,1059 350,1059 410,1059 470,1059 530,1059 590,1059 770,1059 830,1059 890,1059 950,1059 1010,1059 1310,1059 1370,1059 1430,1059 1490,1059 1550,1059 710,1060 730,1060 659.99,1073.87 1340,1075 655.8,1099.53 20,1119 140,1119 200,1119 260,1119 320,1119 380,1119 500,1119 620,1119 860,1119 920,1119 980,1119 1040,1119 1340,1119 1400,1119 1460,1119 1520,1119 715,1120 735,1120 1265,1120 645.69,1123.48 695,1135 535,1140 555,1140 575,1140 630.38,1144.49 683.26,1156.36 610.29,1161 480,1165 500,1165 520,1165 590,1170 667.37,1176.94 110,1179 170,1179 230,1179 290,1179 710,1179 950,1179 1010,1179 1070,1179 1130,1179 1190,1179 1250,1179 1310,1179 1370,1179 1430,1179 1490,1179 1550,1179 460,1180 648.34,1194.65 460,1200 626.41,1208.62 602.32,1218.4 460,1220 576.83,1223.51 550.86,1224.85 480,1235 500,1235 520,1235 20,1239 80,1239 140,1239 200,1239 260,1239 320,1239 380,1239 620,1239 680,1239 980,1239 1040,1239 1100,1239 1160,1239 1220,1239 1280,1239 1340,1239 1400,1239 1460,1239 1520,1239
NetC9_2: C9.2 L1.2 R13.1 U6.6 U7.2 | length 790.4
  Top Layer w8: U7.2 1265,957.84 1260,952.84 1260,905 1285,880 R13.1
  Top Layer w12: L1.2 1015,1090 1095.16,1009.84 U6.6 ; R13.1 C9.2
  Int2 (PWR) w12: v1(1095,965) 1096.08,965 1101.08,960 v1@1263.92,960
  other v1: 1265,960
NetC10_2: C10.2 R14.2 SW1.B1 SW1.B2 | length 239.9
  Top Layer w12: SW1.B1 SW1.B2 R14.2 ; SW1.B1@997.42,570.49 C10.2@1054.51,570.49
  Top Layer w16: C10.2@1054.51,570.49 C10.2
NetLED1_2: LED1.2 R2.1 | length 36.5
  Top Layer w12: LED1.2 R2.1
NetQ1_3: Q1.3 R11.2 R13.2 | length 91.7
  Top Layer w6: Q1.3 1287.96,947.83 1336.29,947.83 R11.2
  Top Layer w12: R13.2 R11.2
NetQ1_5: Q1.5 R6.1 R7.1 R10.1 | length 139.5
  Top Layer w6: R7.1 1198.94,904 1228.94,934 Q1.5
  Top Layer w12: R10.1 R6.1 R7.1
NetR1_2: R1.2 U1.1 | length 56.5
  Top Layer w10: R1.2 U1.1
NetR10_2: R10.2 U6.7 | length 44.6
  Top Layer w6: U6.7 1114.84,937.62 R10.2
NetR11_1: R11.1 R12.2 U7.3 | length 97.3
  Top Layer w12: U7.3 1284.68,985 R11.1 R12.2
NetU6_3: U6.3 U7.4 | length 256.3
  Top Layer w10: U6.3 1095.16,1130.16 1110,1145 1271.87,1145 1284.68,1132.18 U7.4
RESET_N: SW1.A1 SW1.A2 U5.49 | length 256.5
  Top Layer w12: U5.49 891.54,758.46 930,720 SW1.A2 SW1.A1
RTK_STAT: GEO.1 U5.20 | length 472.9
  Top Layer w6: GEO.1 115,1095 115,785 90.01,760.01 56.55,760.01 U5.20
SAFEBOOT_N: SAFE_B.1 U5.50 | length 93.2
  Top Layer w6: U5.50 891.77,801.77 SAFE_B.1
TIMEPULSE: TIME_P.1 U5.53 | length 102.9
  Top Layer w6: U5.53 851.21,918.94 881.06,918.94 TIME_P.1
TX_READY: TX_R.1 U5.46 | length 202.8
  Top Layer w6: v1(890,780) TX_R.1
  Int2 (PWR) w6: v1(838.46,628.54) 890,680.08 v1(890,780)
UART1_RX: J2.4 U4.2 U4.9 U5.43 | length 1049.3
  Top Layer w6: J2.4 255.47,173.48 293.96,135 630,135 890,395 890,476.49 871.49,495 842.09,495 U5.43
  Top Layer w8: U4.2 U4.9 249.68,200.77 J2.4
UART1_TX: J2.5 U4.1 U4.10 U5.42 | length 880.8
  Top Layer w8: U4.1 U4.10 269.37,251.8 304.68,216.48 J2.5 304.68,173.48 326.68,151.48 621.48,151.48 838.46,368.46 U5.42
UART2_RX: J2.2 U4.5 U4.6 U5.26 | length 478.7
  Top Layer w6: U5.26 18.62,498.62 15,495 15,425 100,340 180.63,340 189.63,331 189.63,321 U4.5 ; J2.2 J2.2@160,197.94
  Top Layer w8: J2.2@160,197.94 160,235 190.63,265.63 U4.6 U4.5@190.63,323.34
UART2_TX: J2.3 U4.4 U4.7 U5.27 | length 367.3
  Top Layer w6: U5.27 55,425 120,360 190,360 210.32,339.68 U4.4 ; J2.3 J2.3@210.32,199.04
  Top Layer w8: J2.3@210.32,199.04 U4.7 U4.4
USB_N: J1.A7 J1.B7 R8.2 U3.3 U3.4 | length 721.5
  Bottom Layer w8: R8.2 763.32,475.14 763.32,471.19 768.01,466.5 803.5,466.5 810,460 1080.63,189.37 1149.23,189.37 1150.11,190.25 1167,190.25 U3.3 U3.4 1203,190.25 1219.89,190.25 1220.77,189.37 1236.77,189.37 1239.21,191.82 1259.47,191.82 J1.A7@1260.91,193.25 ; J1.A7 1280.89,197.06 1257.89,197.06 1250,204.95 1250,225 1257.62,232.62 1280.89,232.62 J1.B7
USB_P: J1.A6 J1.B6 R9.2 U3.2 U3.5 | length 749.5
  Bottom Layer w8: R9.2 763.32,444.86 763.32,448.81 768.01,453.5 798.12,453.5 800.81,450.81 1075.24,176.37 1149.23,176.37 1150.11,175.5 1167,175.5 U3.2 U3.5 1203,175.5 1219.89,175.5 1220.77,176.37 1242.15,176.37 1244.59,178.82 1259.47,178.82 1260.91,177.38 1280.89,177.38 J1.B6 1284.7,177.38 1311.62,177.38 1316.31,182.06 1316.31,208.69 1312.06,212.94 1284.7,212.94 J1.A6
USBR_N: R8.1 U5.39 | length 112.1
  Bottom Layer w8: v1(645,425) 647.16,425 651.16,429 651.31,429 656,433.69 656,445.7 676.8,466.5 715.46,466.5 720.14,471.19 720.14,475.14 R8.1
USBR_P: R9.1 U5.40 | length 90.6
  Bottom Layer w8: v1(680,425) 677.84,425 673.84,429 673.69,429 669,433.69 669,440.31 682.19,453.5 715.46,453.5 720.14,448.81 720.14,444.86 R9.1
V_BCKP: BT1.POS C6.1 R1.1 U5.36 | length 797.6
  Top Layer w10: v2(1035,420) 1037.71,420 v2@1042.71,425
  Top Layer w16: v2@1042.71,425 1165,425 1228.03,488.03 BT1.POS
  Int2 (PWR) w16: v2(510,405) 511.08,405 521.08,395 1010,395 v2(1035,420)
VBUS: C1.2 J1.A4_B9 J1.B4_A9 J2.1 U2.5 U2.8 U3.6 | length 315
  Top Layer w10: U2.5 1113.5,289.64 1122.2,280.94 1122.2,266.14 U2.8
  Bottom Layer w16: J1.B4_A9 1286.61,114.32 1310.44,114.32 1345,148.89 1345,260.04 1309.36,295.68 1286.61,295.68 J1.A4_B9
  other v2: 85,170 85,195 85,220 1170,245 1195,245 1220,245 1220,265
VCC_RF: Q1.4 R7.2 U5.7 | length 844.7
  Top Layer w6: R7.2@1198.94,937.46 1209.25,947.78 Q1.4
  Int2 (PWR) w12: v1(465,995) 575,885 1142.54,885 v1(1195,937.46)
ZED_SCL: U5.45 U8.6 | length 140.7
  Top Layer w8: v1(900,495) U8.6
  Int2 (PWR) w8: v1(838.46,585.24) 900,523.7 v1(900,495)
ZED_SDA: U5.44 U8.5 | length 97.8
  Top Layer w8: U5.44 850.21,530.18 881.81,530.18 897.31,514.69 U8.5
pads on no net: J1. J1.A8 J1.B8 J2.7 J2.8 Q1.6 U2.2 U2.3 U2.6 U2.7 U5.8 U5.9 U5.10 U5.11 U5.13 U5.15 U5.16 U5.17 U5.18 U5.21 U5.22 U5.23 U5.24 U5.25 U5.28 U5.29 U5.30 U5.31 U5.35 U5.47 U5.51 U5.52 U7.7 U8.7 U8.9

## Polygon pours and split planes (outlines as drawn)
GND on Top Layer "GND_L01_P015" (solid, remove dead copper, pour order 15): 0,0 1575,0 1575,1340 0,1340
3V3 on Top Layer "3V3_L01_P013" (solid, pour order 13): 1172.4,1092.19 1172.4,1115.81 1238.13,1115.81 1239.32,1117 1251.32,1117 1251.32,1085 1239.32,1085 1232.13,1092.19
3V3 on Top Layer "3V3_L01_P012" (solid, pour order 12): 1172.4,974.87 1235.45,974.87 1239.32,971 1251.32,971 1251.32,1003 1239.32,1003 1234.8,998.49 1172.4,998.49
3V3 on Top Layer "3V3_L01_P010" (solid, pour order 10): 1093.91,228.64 1093.91,204.64 1045.36,204.64 1028.19,221.81 1028.19,311.81 1000,340 950,340 950,386.97 949.8,387.17 1015,387.17 1070,332.17 1070,228.64
VBUS on Top Layer "VBUS_L01_P009" (solid, pour order 9): 119.83,161.48 120,161.48 120,140 75,140 75,228.48 119.83,228.48
VBUS on Top Layer "VBUS_L01_P003" (solid, pour order 3): 1235,234.64 1235,281.81 1156.81,281.81 1152.64,277.64 1117.2,277.64 1117.2,234.64
3V3 on Top Layer "3V3_L01_P002" (solid, pour order 2): 582.56,451.38 582.56,392.32 587.4,387.48 587.4,333.19 612.6,333.19 615.55,336.14 652.8,336.14 652.8,380 614.06,380 614.06,451.38
V_BCKP on Top Layer "V_BCKP_L01_P001" (solid, pour order 1): 495.94,451.38 495.94,376.5 469.13,349.69 469.13,310.31 504.57,310.31 504.57,349.69 527.44,372.56 527.44,451.38
3V3 on Top Layer "3V3_L01_P000" (solid, pour order 0): 372.4,333.19 437.6,333.19 437.6,356.81 440.83,360.04 440.83,451.38 366.02,451.38 366.02,392.32 372.4,385.94
GND on Bottom Layer "GND_L04_P017" (solid, pour order 17): 0,0 1575,0 1575,1340 0,1340
VBUS on Bottom Layer "VBUS_L04_P008" (solid, pour order 8): 1305.43,287.68 1235,287.68 1235,230 1160,230 1160,311.3 1305.43,311.3
GND on Bottom Layer "GND_L04_P006" (solid, pour order 6): 1305.43,90.83 1219.17,90.83 1180,130 1180,163.75 1153.5,163.75 1153.5,121.5 1207.8,67.2 1305.43,67.2
VBUS on Bottom Layer "VBUS_L04_P005" (solid, pour order 5): 1190.64,163.75 1190.64,134.36 1226.3,98.7 1305.43,98.7 1305.43,122.32 1240.68,122.32 1216.5,146.5 1216.5,163.75
GND on Int2 (PWR) "GND_L03_P016" (solid, pour order 16): 0,0 1575,0 1575,1340 0,1340
3V3 on Int2 (PWR) "3V3_L03_P011" (solid, pour order 11): 1020,380 1105,465 1105,680 1295,870 1295,975 1170,975 1170,1120 1215,1120 1215,1025 1335,1025 1335,850 1155,670 1155,445 1025,315 1000,340 370,340 370,380
VBUS on Int2 (PWR) "VBUS_L03_P007" (solid, pour order 7): 120,185 120,160 75,160 75,230 680,230 715,265 1175,265 1175,285 1235,285 1235,220 740,220 705,185
GND on Int1 (GND) "GND_L02_P014" (solid, pour order 14): 0,0 1575,0 1575,1340 0,1340

## Silkscreen, mask and mechanical layers (free items; w line width, h text height)
Mechanical 1:
  the board outline again, w10

## Text inside footprints (layer, text, board x,y; h text height)
J1: Mechanical 13 "PCB EDGE" at 1568.43,-7.6 h16 r90
LED1: Top Overlay "+" at 960.04,199 h32 r270